# Altium PCB usbc-test-v1.PcbDoc (part 2 of 2)
Units mm, origin at the board's own origin, x right, y up, seen from the top; angles counter-clockwise.
Board outline 60 x 134.37 mm, 2 copper layers (Top Layer, Bottom Layer), stack 0.871 mm thick; 68 components, 63 nets, 626 pads, 262 vias.
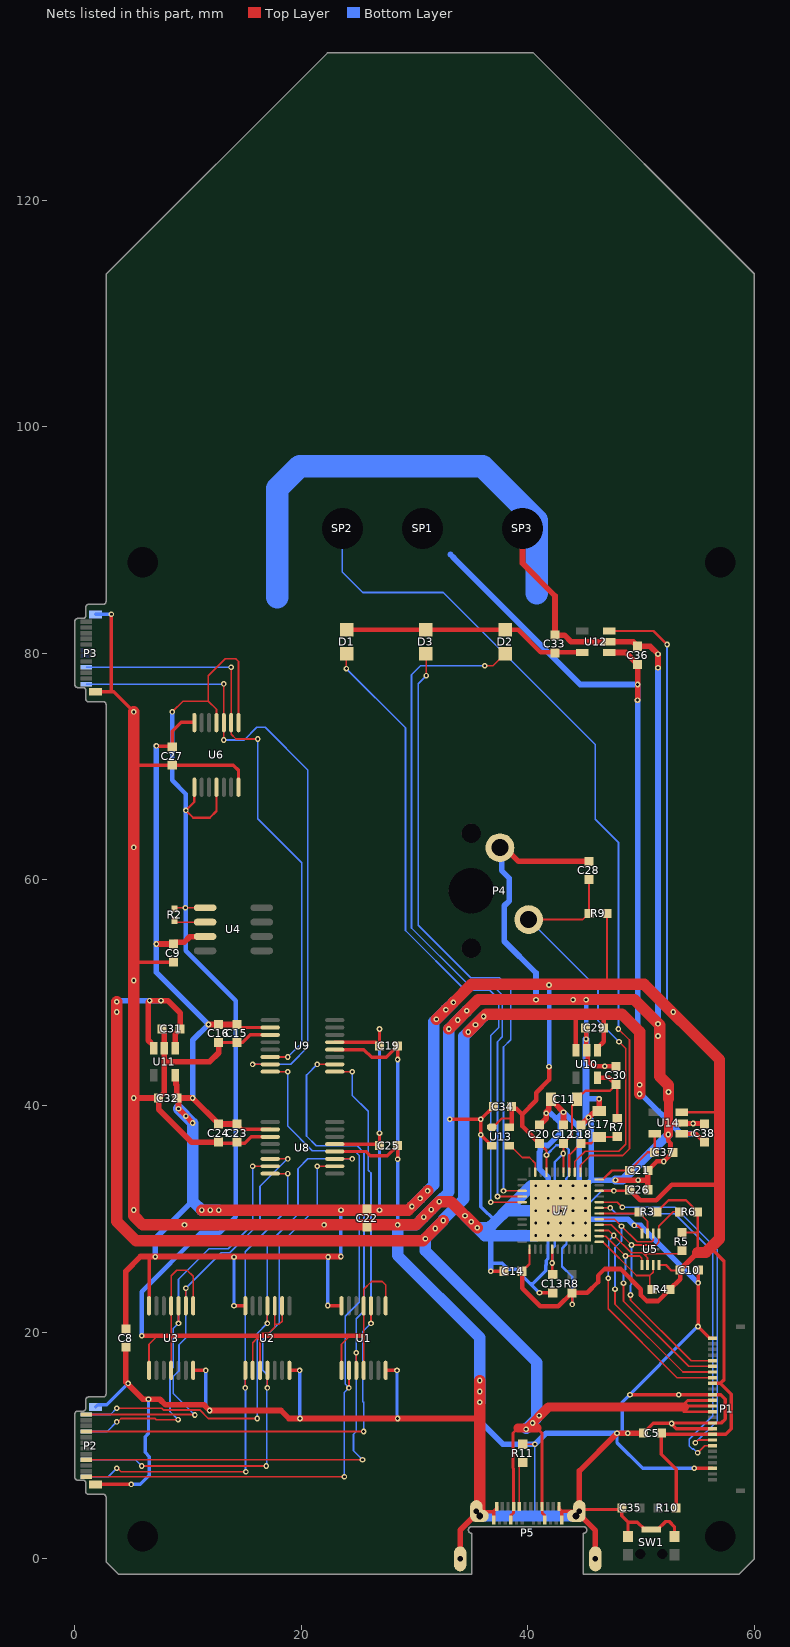
[diagram p2: the nets of this part, all layers, seen from the top]

## Via types
v1: diameter 0.5, hole 0.25, Top Layer to Bottom Layer, tented both sides, 237 vias
v2: diameter 0.5, hole 0.25, Top Layer to Bottom Layer, 25 vias

## Nets (pads, with @x,y where several pads share a name; then routed paths per layer and width w, separated by ;. In a path a pad name is that pad's centre, name@x,y a point inside that pad or via, vN(x,y) a via of type N, cw(c..) or ccw(c..) an arc to the next point about the centre after c; other vN are vias at no path point) (continued)
GND: C5.1 C8.2 C9.2 C10.2 C11.2 C12.2 C13.2 C14.2 C15.2 C16.1 C17.2 C18.2 C19.2 C20.2 C21.2 C22.1 C23.2 C24.1 C25.2 C26.2 C27.2 C28.2 C29.1 C30.1 C31.1 C32.1 C33.1 C34.2 C35.2 C36.1 C37.1 C38.1 P1.1 P1.11 P1.16 P1.17 P1.24 P2.0 P3.0 P4.1 P5.0 P5.A1 P5.A12 P5.B1 P5.B12 P5.MID pad.0@39.525,91 R11.1 SP3.1 SW1.2 SW1.3 SW1.4 U1.7 U2.7 U3.7 U5.4 U6.7 U7.PADDLE U8.3 U8.12 U9.3 U9.12 U10.2 U11.2 U12.2 U13.2 U14.2 | length 716
  Top Layer w0.15: R11.1@39.55,10.125 v1(40.625,10.125) v1@40.65,10.15
  Top Layer w0.2: v1(49.4,29.45) 49.695,29.45 50.075,29.07 U5.4@50.075,28.745
  Top Layer w0.3: P2.0@1.84,6.58 v1(4.98,6.58) v1@5,6.6 ; P3.0@1.84,76.58 3.201,76.58 ; v1(3.22,83.42) 3.22,76.599 3.201,76.58 ; 5.2,52.614 5.286,52.7 C9.2@8.7,52.7 ; 5.2,70.013 5.287,70.1 C27.2@8.6,70.1 14,70.1 14.45,69.65 U6.7@14.45,68.15 ; v1(5.2,74.8) 3.42,76.58 3.201,76.58 ; U3.7@10.45,16.65 v1(11.55,16.65) ; C24.1@12.7,36.8 12.8,36.7 15,36.7 15.575,37.275 U8.3@17.25,37.275 ; C16.1@12.7,45.6 C15.2@14.3,45.6 14.8,45.6 15.475,46.275 U9.3@17.25,46.275 ; U2.7@18.95,16.65 v1(19.85,16.65) ; U8.12@22.95,35.975 25.725,35.975 26.1,35.6 27.6,35.6 C25.2@28.5,36.5 v1(28.5,35.3) ; U9.12@22.95,44.975 25.525,44.975 26.2,44.3 27.5,44.3 C19.2@28.5,45.3 v1(28.5,44.1) ; U1.7@27.45,16.65 v1(28.45,16.65) ; v1(33.1,38.825) v1(35.85,38.825) ; P5.0@35.75,3.792 35.842,3.792 36.225,4.175 36.971,4.175 37,4.204 ; v1(36.725,25.4) C14.2@37.9,25.4 ; U13.2@36.825,36.475 36.725,36.475 36.55,36.65 36.55,36.75 v1(35.85,37.45) v1(35.85,38.825) ; C34.2@36.975,39.95 v1(35.85,38.825) ; P5.B12@37,3.43 37,4.204 ; P5.A1@37.25,4.63 37.25,4.38 37.176,4.38 37,4.204 ; v1(41.025,23.5) C13.2@42.2,23.5 ; P5.A12@42.75,4.63 42.75,4.38 42.824,4.38 43,4.204 ; P5.B1@43,3.43 43,4.204 ; SW1.2@48.85,1.975 48.85,3.25 ; v1(49.025,14.5) P1.11@56.3,14.5 57.025,14.5 57.425,14.1 57.425,12.35 57.075,12 P1.16@56.3,12 52.675,12 v1@52.65,11.975 ; C5.1@50.2,11.1 51.075,11.975 v1@52.65,11.975 ; SW1.4@52.95,1.975 52.95,2.85 52.5,3.3 52.175,3.3 51.475,2.6 SW1.3@50.9,2.6 50.325,2.6 49.675,3.25 48.85,3.25 ; v1(54.7,8) P1.24@56.3,8 ; C10.2@55.05,25.5 55.037,25.488 v1(55.037,24.373) 55.037,20.538 v1(55.025,20.525) 56.05,19.5 P1.1@56.3,19.5 ; P1.17@56.3,11.5 53.125,11.5 v1@52.65,11.975 ; 43,4.204 44.534,4.204 P5.0@44.55,4.22 44.69,4.36 48.16,4.36 C35.2@48.3,4.5 48.3,3.8 48.85,3.25
  Top Layer w0.4: C29.1@45.1,46.9 45.15,46.85 v1(45.15,45.9) 45.15,44.95 U10.2@45.2,44.9 45.3,44.8 45.3,43.975 45.775,43.5 C30.1@47.8,43.5 ; C21.2@50.6,34.3 51.4,35.1 v1(52,35.1) C37.1@52.8,35.9 52.6,36.1 52.6,36.725 52.4,36.925 v1(52.4,37.475) 52.4,38.025 52.425,38.05 52.75,38.375 53.475,38.375 U14.2@53.6,38.5 53.65,38.45 v1(54.6,38.45) 55.55,38.45 C38.1@55.6,38.4
  Top Layer w0.5: C8.2@4.5,18.7 4.5,15.6 6,14.1 v1(6.5,14.1) 7.5,14.1 8,13.6 11.4,13.6 v1(11.9,13.1) 18.2,13.1 18.9,12.4 v1(19.875,12.4) v1(28.5,12.4) 35.75,12.4 ; v1(5.2,40.7) 5.3,40.7 C32.1@7.4,40.7 ; C31.1@7.7,46.8 7.9,46.6 U11.2@7.9,45.1 7.9,43.915 ; C24.1@12.7,36.8 10.3,36.8 7.4,39.7 C32.1@7.4,40.7 ; C16.1@12.7,45.6 12.7,44.7 11.915,43.915 7.9,43.915 ; P5.MID@34.03,0 34.03,2.551 35.157,3.678 35.635,3.678 P5.0@35.75,3.792 ; P4.1@37.54,62.81 37.977,62.81 39.187,61.6 C28.2@45.4,61.6 ; SP3.1@39.525,91 39.525,87.925 42.4,85.05 C33.1@42.4,81.6 42.418,81.582 43.243,81.582 43.825,81 U12.2@47.2,81 49.3,81 C36.1@49.7,80.6 50.8,80.6 v1(51.5,79.9) v1(51.5,78.7) ; C20.2@41.025,38.3 41.625,38.9 41.625,39.475 41.85,39.7 41.85,40.4 C11.2@42.05,40.6 42.05,40.45 42.25,40.25 42.35,40.25 v1(43.15,39.45) C12.2@43.15,38.3 ; C18.2@44.7,38.3 45.75,39.35 46.1,39.35 C17.2@46.3,39.55 v1(46.3,40.625) ; P5.MID@45.97,0 45.97,2.511 44.55,3.931 P5.0@44.55,4.22 44.55,7.775 v1(47.875,11.1) v1(48.825,11.1) C5.1@50.2,11.1 ; v1(47.75,33.45) v1(49.739,33.45) 50.6,33.45 ; C26.2@50.6,32.6 50.6,33.45 ; C21.2@50.6,34.3 50.6,33.45 ; C32.1@7.4,40.7 7.9,41.2 7.9,43.915
  Top Layer w0.8: v1(52.4,37.475) 52.425,37.5 52.425,38.05 52.425,38.375 52.425,40.625
  Top Layer w1: v1(5.2,74.8) 5.2,70.013 5.2,52.614 v1(5.2,40.7) 5.2,30.3 6,29.5 v1(28.5,29.5) 30.125,29.5 v1(30.81,30.185) v1(31.466,30.841) v1(32.175,31.55) 33.2,31.55 v1(34.45,30.3) 34.475,30.3 v1(35,29.775) v1(35.538,29.238) ; v1(33.025,46.8) v1(33.813,47.588) 34.612,48.388 35.625,49.4 40.725,49.4 44,49.4 45.15,49.4 49.4,49.4 51.65,47.15 51.65,46.175 51.65,42.6 52.425,41.825 v1(52.425,41.225) 52.425,40.625 ; P5.0@35.75,3.792 35.75,12.4 v1(35.75,13.832) v1(35.75,14.776) v1(35.75,15.75)
  Bottom Layer w0.15: 40.578,3.792 40.625,3.839 v1(40.625,10.125)
  Bottom Layer w0.3: P2.0@1.84,13.42 2.04,13.62 2.82,13.62 v1(4.7,15.5) ; P3.0@1.84,83.42 v1(3.22,83.42) v1@3.225,83.425 ; v1(4.98,6.58) 5.78,6.58 6.576,7.376 6.576,9.024 6.2,9.4 6.2,10.8 6.5,11.1 v1(6.5,14.1) ; v1(11.55,16.65) 11.55,13.504 11.9,13.154 v1(11.9,13.1) ; v1(19.85,16.65) 19.862,16.638 19.862,12.412 v1(19.875,12.4) ; v1(28.45,16.65) 28.45,12.45 v1(28.5,12.4) ; v1(28.5,29.5) v1(28.5,35.3) v1(28.5,44.1) ; v1(35.85,37.45) 35.85,31.1 37.15,29.8 ; 36.725,26.121 37.754,26.121 38.3,25.575 38.95,25.575 40.228,24.297 ; v2(40.7,28.55) v2(41.8,28.55) ; v1(41.025,23.5) 40.228,24.297 ; v2(41.8,32.95) v2(41.8,31.85) v2(41.8,29.65) v2(41.8,28.55) ; v2(42.9,28.55) v2(42.9,29.65) v2(42.9,30.75) v2(42.9,31.85) v2(42.9,32.95) ; v2(44,28.55) v2(44,30.75) ; v2(44,31.85) 44.825,32.675 44.825,32.95 ; v2(45.1,28.55) v2(45.1,29.65) v2(45.1,30.75) ; v1(47.875,11.1) 47.875,10.275 50.15,8 v1(54.7,8) ; 48.35,11.1 48.35,13.85 v1(55.025,20.525) ; 40.228,24.297 40.422,24.297 41.575,25.45 41.575,25.925 41.63,25.98 41.63,26.34 41.78,26.49 41.78,28.53 v2(41.8,28.55)
  Bottom Layer w0.4: v1(44,49.375) v1(45.15,49.375) ; v1(45.15,45.9) v1(45.15,49.375) ; v1@45.175,49.4 v1(45.15,49.375)
  Bottom Layer w0.5: v1(35.75,13.832) 35.75,12.175 37.8,10.125 v1(40.625,10.125) 41.6,11.1 v1(47.875,11.1) 48.35,11.1 v1(48.825,11.1) ; v1(36.725,25.4) 36.725,26.121 36.725,28.4 36.875,28.55 ; P4.1@37.54,62.81 37.685,62.665 37.685,60.79 38.375,60.1 38.375,58.125 37.925,57.675 37.925,54.55 40.725,51.75 v1(40.725,49.375) ; v2(40.7,32.95) v2(41.8,32.95) 41.8,33.675 41.03,34.445 41.03,35.916 41.1,35.986 41.1,36.2 41.4,36.5 41.775,36.5 42.85,37.575 42.85,38.527 42.439,38.938 ; v1(41.632,39.348) 42.028,39.348 42.439,38.938 ; v2(44,29.65) v2(45.1,29.65) 45.45,30 48.85,30 v1(49.4,29.45) 49.96,29.45 v1(55.037,24.373) ; v2(44,32.95) 44.55,32.95 ; v2(45.1,31.85) v2(45.1,32.95) ; 45.15,40.63 45.155,40.625 v1(46.3,40.625) ; v1(45.352,38.982) 45.6,38.734 45.6,33.45 ; v1(47.75,33.45) 45.6,33.45 ; v1@51.475,46.15 v1(51.5,46.175) v1(51.5,47.249) v1(51.5,79.9) ; 42.439,38.938 42.638,38.938 v1(43.15,39.45) 44.55,38.05 44.55,32.95 ; 44.55,32.95 44.825,32.95 v2(45.1,32.95) ; v2(45.1,32.95) 45.6,33.45
  Bottom Layer w0.6: 44.55,38.05 45.15,38.65 45.15,40.63 v1(45.15,45.9)
  Bottom Layer w0.8: v1(47.75,33.45) 48.375,33.45 v1(52.4,37.475)
  Bottom Layer w1: v1(34.45,30.3) 36.2,28.55 36.875,28.55 v2(40.7,28.55) v2(40.7,30.75) ; v1(34.6,48.4) 34.6,48.375 v1(33.813,47.588) v1(33.025,46.8) 33.025,32.4 v1(32.175,31.55) v1(31.466,30.841) v1(30.81,30.185) 30.125,29.5 v1(28.5,29.5) 28.5,26.8 35.75,19.55 v1(35.75,14.776) v1(35.75,13.832) ; v1(35.538,29.238) 36.587,29.238 37.15,29.8 38.187,30.837 ; P5.0@35.75,3.792 40.578,3.792 44.504,3.792 44.55,3.839 P5.0@44.55,4.22 ; 38.187,30.837 40.3,32.95 v2(40.7,32.95) v2(40.7,30.75) ; 38.187,30.837 38.274,30.75 v2(40.7,30.75)
  Bottom Layer w2: 17.875,84.925 17.875,94.525 19.85,96.5 36,96.5 40.775,91.725 40.775,85.275
  other v1: 52.7,11.95 53.325,14.5 9.684,29.5 22.012,29.5 5.2,30.818 46.788,43.5 5.2,51.085 5.2,62.835
  other v2: 40.7,29.65 41.8,30.75 40.7,31.85
GND_A1: P2.A1 U1.2 U9.8 | length 67.3
  Top Layer w0.15: P2.A1@1,7.25 v1(23.8,7.25) ; U9.8@17.25,43.025 v1(18.8,43.025) ; v1(24.2,15.1) U1.2@24.2,16.65
  Bottom Layer w0.15: v1(18.8,43.025) 18.8,38.225 20.975,36.05 24.7,36.05 25.125,35.625 25.125,22.675 23.875,21.425 23.875,15.447 24.2,15.122 v1(24.2,15.1) 23.8,14.7 v1(23.8,7.25)
GND_A12: P2.A12 U3.9 U8.6 | length 40.8
  Top Layer w0.15: P2.A12@1,12.75 1.005,12.745 10.555,12.745 v1(10.6,12.7) v1@10.65,12.75 ; U3.9@9.8,22.35 v1(9.8,23.9) ; U8.6@17.25,35.325 v1(18.8,35.325)
  Bottom Layer w0.15: v1(10.6,12.7) 8.7,14.6 8.7,16.1 9.2,16.6 9.2,18.9 9.8,19.5 v1(9.8,23.9) 12.925,27.025 13.675,27.025 16.35,29.7 16.35,32.9 18.775,35.325 v1(18.8,35.325)
GND_B1: P2.B1 U2.11 U8.11 | length 47.5
  Top Layer w0.15: v1(3.7,13.3) 7.671,13.3 7.816,13.155 11.015,13.155 11.77,12.4 v1(16.1,12.4) ; v1(17,20.8) U2.11@17,22.35 ; U8.11@22.95,35.325 v1(24.5,35.325)
  Bottom Layer w0.15: P2.B1@1,12.75 3.15,12.75 v1(3.7,13.3) ; v1(16.1,12.4) 16.1,19.9 v1(17,20.8) 17,27.75 19.7,30.45 19.7,34.45 20.575,35.325 v1(24.5,35.325)
GND_B12: P2.B12 U2.1 U8.8 | length 45.5
  Top Layer w0.15: v1(3.7,8) 3.772,8 4.072,7.7 v1(15.1,7.7) ; v1(15.05,15.1) U2.1@15.05,16.65 ; U8.8@17.25,34.025 v1(18.8,34.025)
  Bottom Layer w0.15: P2.B12@1,7.25 2.95,7.25 v1(3.7,8) ; v1(15.1,7.7) 15.075,7.725 15.075,15.075 v1(15.05,15.1) 15.05,27.125 18.8,30.875 v1(18.8,34.025)
GND_EX: P3.A12 U6.10 U9.7 | length 58.1
  Top Layer w0.15: v1(13.15,72.325) U6.10@13.15,73.85 v1(13.15,77.275) ; v1(15.7,43.675) U9.7@17.25,43.675
  Bottom Layer w0.15: P3.A12@1,77.25 v1@13.15,77.25 ; v1(13.15,72.325) 14.95,72.325 16.075,73.45 16.8,73.45 20.575,69.675 20.575,45.2 19.05,43.675 v1(15.7,43.675)
ITEST: R2.1 U1.1 U1.4 U1.8 U1.11 U2.2 U2.3 U2.9 U2.10 U3.1 U3.4 U3.8 U3.11 U4.1 U6.1 U6.4 U6.8 U6.11 | length 152.1
  Top Layer w0.15: U3.1@6.55,16.65 6.55,18.95 7.3,19.7 ; U3.4@8.5,16.65 8.5,19.612 8.412,19.7 8.5,19.788 U3.11@8.5,22.35 8.5,25 9,25.5 9.9,25.5 10.45,24.95 U3.8@10.45,22.35 ; v1(8.6,74.8) 9.55,75.75 11.775,75.75 ; R2.1@8.8,57.4 8.905,57.505 U4.1@11.5,57.505 ; U6.11@12.5,73.85 12.5,75.025 11.775,75.75 ; U6.8@14.45,73.85 14.45,79.25 14.2,79.5 13.275,79.5 11.775,78 11.775,75.75 ; U2.2@15.7,16.65 15.7,19.1 16.1,19.5 ; U2.3@16.35,16.65 16.35,19.25 16.1,19.5 ; U2.10@17.65,22.35 17.65,20.727 ; U2.9@18.3,22.35 18.3,21 18.027,20.727 17.65,20.727 ; U1.1@23.55,16.65 23.55,18.95 24.3,19.7 ; U1.4@25.5,16.65 25.5,19.612 25.412,19.7 25.5,19.788 U1.11@25.5,22.35 25.5,23.8 26.2,24.5 27.136,24.5 27.45,24.186 U1.8@27.45,22.35 ; 16.1,19.5 16.3,19.7 16.5,19.9 17.1,19.9 17.65,20.45 17.65,20.727
  Top Layer w0.2: U6.1@10.55,68.15 10.55,66.85 v1(9.8,66.1) 10.45,65.45 11.9,65.45 12.5,66.05 U6.4@12.5,68.15
  Top Layer w0.4: v1(5.9,19.7) 7.3,19.7 8.412,19.7 16.3,19.7 24.3,19.7 25.412,19.7
  Bottom Layer w0.4: v1(5.9,19.7) 5.9,23.6 11.1,28.8 12.8,28.8 14.2,30.2 14.2,49.3 9.8,53.7 v1(9.8,66.1) 9.8,67.55 8.6,68.75 v1(8.6,74.8)
  other v1: 9.759,57.505
NetD1_2: D1.2 U7.41 | length 58.4
  Top Layer w0.15: v1(23.975,78.625) 23.975,79.925 D1.2@24,79.95 ; v1(36.725,31.5) U7.41@39.5,31.5
  Bottom Layer w0.15: v1(23.975,78.625) 29.2,73.4 29.2,55.5 34.475,50.225 36.625,50.225 37.425,49.425 37.425,46.925 36.725,46.225 v1(36.725,31.5)
NetD2_2: D2.2 U7.40 | length 62.1
  Top Layer w0.15: v1(36.2,78.875) 36.925,78.875 D2.2@38,79.95 ; v1(37.325,32) U7.40@39.5,32
  Bottom Layer w0.15: v1@36.225,78.9 v1(36.2,78.875) 30.525,78.875 29.73,78.08 29.73,55.72 34.625,50.825 36.725,50.825 37.75,49.8 37.75,46.1 37.325,45.675 v1(37.325,32)
NetD3_2: D3.2 U7.39 | length 54.6
  Top Layer w0.15: D3.2@31,79.95 31.025,79.925 v1(31.025,78) ; v1(37.85,32.5) U7.39@39.5,32.5
  Bottom Layer w0.15: v1(31.025,78) 30.314,77.289 30.314,55.961 34.95,51.325 37.5,51.325 38.5,50.325 38.5,45.85 37.85,45.2 v1(37.85,32.5)
NetP5_A5: P5.A5 R11.2 | length 4
  Top Layer w0.15: P5.A5@39.25,4.63 39.25,8.225 R11.2@39.55,8.525
NetR2_2: R2.2 U4.2 | length 2.8
  Top Layer w0.15: R2.2@8.8,56.4 8.965,56.235 U4.2@11.5,56.235
P1.2V: C11.1 C12.1 C13.1 C30.2 R7.1 U7.5 U7.30 U10.5 | length 28.4
  Top Layer w0.2: U7.5@42.15,27.35 v1(42.15,26.125) 42.15,25.15 C13.1@42.2,25.1 ; U7.30@43.15,34.15 43.15,36.45 C12.1@43.4,36.7 ; C12.1@43.15,36.7 43.9,37.45 43.9,40 44.35,40.45 C11.1@44.35,40.6 44.35,40.75 44.7,41.1 44.85,41.1 45.1,41.35 47.25,41.35 C30.2@47.8,41.9 47.9,41.8 R7.1@47.9,38.9
  Top Layer w0.4: U10.5@46.15,42.5 47.2,42.5 C30.2@47.8,41.9
  Bottom Layer w0.2: v1(42.15,26.125) 42.15,27.366 42.375,27.591 42.375,35.05 v1(43.125,35.8)
P2.5V: C21.1 C37.2 U7.24 U14.5 | length 7.5
  Top Layer w0.2: U7.24@46.3,33.5 46.625,33.5 47.425,34.3 C21.1@49,34.3 50.6,35.9 C37.2@51.2,35.9 U14.5@51.2,37.55
P3.3V: C5.2 C8.1 C9.1 C10.1 C14.1 C15.1 C16.2 C19.1 C20.1 C22.2 C23.1 C24.2 C25.1 C26.1 C27.1 C32.2 C34.1 P1.9 P1.18 R3.1 R4.1 R5.1 R6.1 R8.1 R9.1 R10.1 U1.14 U2.14 U3.14 U4.3 U5.8 U6.14 U7.1 U7.22 U7.33 U8.2 U8.13 U9.2 U9.13 U11.5 U12.3 U13.1 U13.4 U14.3 | length 412.6
  Top Layer w0.2: U13.1@36.825,38.125 36.925,38.125 37.693,38.893 38.575,38.893 ; C14.1@39.5,25.4 40.15,26.05 U7.1@40.15,27.35 ; C20.1@41.025,36.7 41.65,36.075 v1(41.65,35.659) U7.33@41.65,34.15 ; R8.1@43.9,23.5 43.925,23.475 v1(43.925,22.475) ; U7.22@46.3,32.5 v1(47.6,32.5) 48.9,32.5 C26.1@49,32.6 ; 46.992,50.75 47,50.758 R9.1@47,57 ; U12.3@47.2,81.95 51.1,81.95 v1(52.3,80.75) ; R3.1@51.4,30.65 52.425,31.675 53.975,31.675 R6.1@55,30.65 55,28.85 ; U5.8@51.575,25.955 52.195,25.955 52.675,25.475 53.425,25.475 C10.1@53.45,25.5 ; R5.1@53.6,28.825 54.975,28.825 55,28.85 ; U14.3@53.6,39.45 56.864,39.45 56.925,39.389 ; 55,27.05 55,28.85
  Top Layer w0.3: U3.14@6.55,22.35 6.55,26.601 6.649,26.7 ; v1(7.2,71.8) 7.238,71.762 8.538,71.762 C27.1@8.6,71.7 8.6,73.1 9.4,73.9 10.527,73.9 10.55,73.877 U6.14@10.55,73.85 ; v1@14,22.4 v1(14.05,22.35) U2.14@15.05,22.35 ; C23.1@14.3,38.4 14.775,37.925 U8.2@17.25,37.925 ; C15.1@14.3,47.2 14.575,46.925 U9.2@17.25,46.925 ; 15.05,26.695 15.055,26.7 ; v1@22.3,22.4 v1(22.325,22.375) 22.35,22.35 U1.14@23.55,22.35 ; U8.13@22.95,36.625 22.96,36.615 26.785,36.615 C25.1@26.9,36.5 v1(26.9,37.6) ; U9.13@22.95,45.625 26.575,45.625 C19.1@26.9,45.3 v1(26.9,46.8) ; v1(23.493,26.7) v1@23.55,26.643 ; C5.2@51.8,11.1 C5.2@51.9,11 ; R10.1@53.1,4.5 53.1,7.925 51.8,9.225 51.8,10.9 C5.2@51.9,11 ; 56.275,27.325 57.325,26.275 57.325,15.825 57,15.5 ; P1.9@56.3,15.5 57,15.5 ; C5.2@51.9,11 P1.18@56.3,11 57.5,11 57.975,11.475 57.975,14.525 57,15.5
  Top Layer w0.4: U13.4@38.375,38.125 38.45,38.125 38.575,38.25 38.575,38.893 C34.1@38.575,39.95 38.775,39.75 39,39.75 39.5,39.25 ; C14.1@39.5,25.4 39.5,23.9 41.1,22.3 42.7,22.3 R8.1@43.9,23.5 45.25,23.5 46.2,24.45 46.2,25.025 46.775,25.6 48.2,25.6 49.975,23.825 49.975,23.3 50.5,22.775 51.525,22.775 R4.1@52.55,23.8 53.45,24.7 C10.1@53.45,25.5 ; C20.1@41.025,36.7 39.5,38.225 39.5,39.25 ; v1(41.875,43.475) 41.875,42.3 40.75,41.175 40.75,40.5 39.5,39.25 ; C26.1@49,32.6 49.925,31.675 51.35,31.675 52.718,33.043 56.925,33.043
  Top Layer w0.5: C8.1@4.5,20.3 4.5,25.4 5.8,26.7 6.649,26.7 15.055,26.7 v1(23.493,26.7) ; v1(7.2,54.3) C9.1@8.7,54.3 8.85,54.45 9.65,54.45 10.146,54.946 11.481,54.946 U4.3@11.5,54.965 ; U11.5@8.85,42.7 8.925,42.625 8.925,41.925 9,41.85 C32.2@9,40.7 ; v1(10.4,38.5) v1(9.8,39.1) v1(9.15,39.75) 9.15,40.55 C32.2@9,40.7 ; v1(11.8,47.2) C16.2@12.7,47.2 C15.1@14.3,47.2 ; C23.1@14.3,38.4 C24.2@12.7,38.4 v1(10.4,40.7) C32.2@9,40.7 ; C10.1@53.45,25.5 55,27.05
  Top Layer w1: v1(11.2,30.8) v1(11.95,30.8) v1(12.7,30.8) v1(23.5,30.8) v1(26.9,30.8) 29.45,30.8 v1(29.764,31.114) v1(30.491,31.841) v1(31.15,32.5) ; v1(31.926,47.651) v1(32.765,48.49) v1(33.425,49.15) 35.025,50.75 46.992,50.75 50.275,50.75 56.925,44.1 56.925,39.389 56.925,33.043 56.925,28.275 55.7,27.05 55,27.05
  Bottom Layer w0.2: v1(41.65,35.659) 42.516,36.525 43.25,36.525 43.625,36.15 43.625,33.825 43.4,33.6 43.4,31.625 43.75,31.275 ; v1(43.925,22.475) 43.925,24.925 43.025,25.825 43.025,27.4 43.425,27.8 43.425,30.95 43.75,31.275 ; v1(47.6,32.5) 46.525,32.5 45.3,31.275 43.75,31.275 ; v1(52.3,80.75) 52.3,48.85 v1(52.85,48.3)
  Bottom Layer w0.3: v1(14.05,22.35) v1(14.05,26.65) v1@14.1,26.7 ; v1(22.325,22.375) 22.325,26.625 v1(22.363,26.663) v1@22.4,26.7 ; v1(23.493,26.7) 23.493,30.793 v1(23.5,30.8) ; v1(26.9,30.8) v1(26.9,37.6) v1(26.9,46.8)
  Bottom Layer w0.4: v1(41.875,43.475) v1(41.875,50.675)
  Bottom Layer w0.5: v1(7.1,26.675) 7.1,28.3 10.4,31.6 ; v1(7.2,71.8) v1(7.2,54.3) 7.2,51.8 v1(11.8,47.2) 10.4,45.8 v1(10.4,40.7)
  Bottom Layer w1: v1(9.15,39.75) v1(10.4,38.5) 10.4,31.6 v1(11.2,30.8) v1(11.95,30.8) v1(12.7,30.8) ; v1(29.764,31.114) v1(30.491,31.841) v1(31.15,32.5) 31.7,33.05 31.7,47.425 v1(31.926,47.651) v1(32.765,48.49) v1(33.425,49.15)
P3.8V: C33.2 D1.1 D2.1 D3.1 U12.5 | length 21.6
  Top Layer w0.4: D1.1@24,82.05 D3.1@31,82.05 D2.1@38,82.05 39.15,82.05 41.15,80.05 U12.5@44.8,80.05
RUN: C28.1 P4.2 R9.2 U7.28 | length 38
  Top Layer w0.15: P4.2@40.08,56.46 44.86,56.46 R9.2@45.4,57 C28.1@45.4,60 ; U7.28@44.15,34.15 44.15,35.1 45.063,36.013 48.038,36.013 48.65,36.625 48.65,45.075 v1(48.05,45.675)
  Bottom Layer w0.15: P4.2@40.08,56.46 46.2,50.34 46.2,47.525 v1(48.05,45.675)
SCREEN_TX: pad.0@23.625,91 SP2.1 U7.27 | length 75
  Top Layer w0.15: U7.27@44.65,34.15 44.65,34.775 45.5,35.625 48.375,35.625 48.975,36.225 48.975,45.825 v1(48,46.8)
  Bottom Layer w0.15: pad.0@23.625,91 23.625,87.15 25.425,85.35 32.525,85.35 45.95,71.925 45.95,65.325 48,63.275 v1(48,46.8)
SYSCLK: U7.35 U13.3 | length 3.7
  Top Layer w0.15: U13.3@38.375,36.475 38.475,36.475 39.5,35.45 40.15,35.45 40.65,34.95 U7.35@40.65,34.15
UART_RX: P1.19 U7.20 | length 31.6
  Top Layer w0.15: U7.20@46.3,31.5 47.9,31.5 v1(48.35,31.05) ; v1(54.8,10.25) 55.05,10.5 P1.19@56.3,10.5
  Bottom Layer w0.15: v1(48.35,31.05) 53,31.05 56.725,27.325 56.725,12.175 v1(54.8,10.25)
UART_TX: P1.20 U7.19 | length 32.2
  Top Layer w0.15: U7.19@46.3,31 v1(47.275,31) ; v1(55,9.375) 55.625,10 P1.20@56.3,10
  Bottom Layer w0.15: v1(47.275,31) 47.8,30.475 52.975,30.475 56.325,27.125 56.325,12.65 54.25,10.575 54.25,9.963 54.51,9.702 54.656,9.702 54.983,9.375 v1(55,9.375)
UP5K_CIPO: P1.7 U5.2 U7.17 | length 24.5
  Top Layer w0.15: U7.17@46.3,30 47.65,30 v1@48.267,29.383 ; v1(47.7,23.824) 47.7,22.5 53.7,16.5 P1.7@56.3,16.5 ; v1(48.267,29.38) v1@48.267,29.383 ; U5.2@51.075,28.745 51.075,28.125 50.95,28 49.65,28 v1@48.267,29.383
  Bottom Layer w0.15: v1(47.7,23.824) 47.7,27.5 48.267,28.067 v1(48.267,29.38)
UP5K_COPI: P1.6 U5.5 U7.14 | length 19.5
  Top Layer w0.15: U7.14@46.3,28.5 46.875,28.5 v1(48.625,26.75) 49.875,26.75 50.075,26.55 U5.5@50.075,25.955 ; v1(48.45,24.35) 48.45,22.75 54.2,17 P1.6@56.3,17
  Bottom Layer w0.15: v1(48.45,24.35) 48.45,25.375 48.625,25.55 v1(48.625,26.75)
UP5K_CSN: P1.5 R6.2 U5.1 U7.16 | length 24.2
  Top Layer w0.15: U7.16@46.3,29.5 47.375,29.5 v1(49.15,27.725) 51.35,27.725 51.575,27.95 51.575,28.025 U5.1@51.575,28.745 51.575,29.375 52.85,30.65 R6.2@53.4,30.65 ; v1(49.075,23.307) 49.075,22.85 54.425,17.5 P1.5@56.3,17.5
  Bottom Layer w0.15: v1(49.075,23.307) 49.075,24.175 49.15,24.25 v1(49.15,27.725)
UP5K_DIO2: R3.2 U5.3 U7.18 | length 5.6
  Top Layer w0.15: U7.18@46.3,30.5 49.9,30.5 50.575,29.825 U5.3@50.575,28.745
UP5K_DIO3: R4.2 U5.7 U7.13 | length 8.1
  Top Layer w0.15: U7.13@46.3,28 46.625,28 49.6,25.025 50.775,25.025 ; R4.2@50.95,23.8 50.775,23.975 50.775,25.025 ; U5.7@51.075,25.955 51.075,25.325 50.775,25.025
UP5K_PLL: C17.1 C18.1 R7.2 U7.29 | length 6.4
  Top Layer w0.2: U7.29@43.65,34.15 43.65,35.65 C18.1@44.7,36.7 45.6,36.7 46.15,37.25 C17.1@46.3,37.25 47.85,37.25 R7.2@47.9,37.3
UP5K_SCK: P1.8 R5.2 U5.6 U7.15 | length 27.7
  Top Layer w0.15: U7.15@46.3,29 47.15,29 v1(47.594,28.556) 49.125,27.025 50.15,27.025 50.363,26.812 ; v1(47.109,24.777) 47.1,24.768 47.1,22.075 53.175,16 P1.8@56.3,16 ; U5.6@50.575,25.955 50.575,26.6 50.363,26.812 ; R5.2@53.6,27.225 53.325,26.95 50.5,26.95 50.363,26.812
  Bottom Layer w0.15: v1(47.109,24.777) 47.1,24.786 47.1,25.368 47.145,25.413 47.145,28.107 v1(47.594,28.556)
VBUS: C29.2 C31.2 C36.2 C38.2 P1.12 P1.13 P1.14 P5.A4 P5.A9 P5.B4 P5.B9 pad.0@30.7,91 SP1.1 U10.1 U10.3 U11.1 U11.3 U12.1 U14.1 | length 250.7
  Top Layer w0.25: P5.B9@38.5,3.43 38.525,3.455 38.525,3.851 38.725,4.051 38.725,4.605 P5.A4@38.75,4.63 38.75,7.956 38.679,8.028 38.679,11.104 39.125,11.55 ; 40.8,11.55 41.25,11.1 P5.A9@41.25,4.63 41.275,4.605 41.275,4.051 41.475,3.851 41.475,3.455 P5.B4@41.5,3.43 ; P1.14@56.3,13 53.8,13 53.775,13.025 53.85,13.1 ; P1.13@56.3,13.5 54.25,13.5 53.85,13.1 ; P1.12@56.3,14 54.125,14 53.85,13.725 53.85,13.413 53.85,13.1
  Top Layer w0.4: U10.3@44.25,44.9 44.25,48.05 44.3,48.1 ; U10.1@46.15,44.9 46.15,45.125 46.7,45.675 C29.2@46.7,46.9 46.7,48.077 46.677,48.1 ; U14.1@53.6,37.55 v1(54.624,37.55) 54.85,37.55 C38.2@55.6,36.8
  Top Layer w0.5: U11.3@6.95,45.1 6.95,45.325 6.475,45.8 6.475,49.175 v1(6.6,49.3) v1(7.6,49.3) 8.2,49.3 9.3,48.2 C31.2@9.3,46.8 8.85,46.35 U11.1@8.85,45.1 ; U12.1@47.2,80.05 48.65,80.05 C36.2@49.7,79 v1(49.7,77.225) 49.7,75.85 v1@49.675,75.825
  Top Layer w0.8: 39.125,11.55 v1@39.963,11.55 ; 40.8,11.55 v1@39.963,11.55 ; 53.85,13.413 41.825,13.413 v1@39.963,11.55
  Top Layer w1: v1(3.7,49.2) v1(3.7,48.3) 3.7,29.8 5.4,28.1 30.75,28.1 v1(31.825,29.175) v1(32.533,29.883) ; v1(34.735,46.535) v1(35.377,47.177) v1(36.1,47.9) 36.3,48.1 44.3,48.1 46.677,48.1 48.325,48.1 49.875,46.55 v1(49.875,41.879) v1(49.875,41.05)
  Bottom Layer w0.5: v1(3.7,48.3) v1(3.7,49.2) 3.8,49.3 v1(6.6,49.3) v1(7.6,49.3) ; 33.175,88.7 33.5,88.375 33.5,88.35 44.625,77.225 v1(49.7,77.225) 49.7,44.025 49.825,43.9 49.825,41.929 v1(49.875,41.879) 49.875,41.2 53.525,37.55 v1(54.624,37.55)
  Bottom Layer w1: v1(30.95,28.275) 30.95,27.2 40.8,17.35 40.8,12.45 v1@39.875,11.525 ; v1@30.95,28.3 v1(31.825,29.175) v1(32.533,29.883) 32.533,29.967 34.35,31.784 34.35,46.15 v1(34.735,46.535) v1(35.377,47.177) v1(36.1,47.9)
  other v1: 39.85,11.45 40.425,12 41,12.65 49.688,75.837
VBUS_A4: P2.A4 U1.3 U9.10 | length 67.7
  Top Layer w0.15: P2.A4@1,8.75 v1(25.4,8.75) ; v1(21.4,43.675) U9.10@22.95,43.675 ; U1.3@24.85,16.65 v1(24.85,18.2)
  Bottom Layer w0.15: v1(21.4,43.675) 20.45,42.725 20.45,37.35 21.325,36.475 24.925,36.475 25.525,35.875 25.525,21.875 24.85,21.2 v1(24.85,18.2) 24.85,11.25 24.6,11 24.6,9.55 v1(25.4,8.75)
VBUS_A9: P2.A9 U1.10 U9.9 | length 60.4
  Top Layer w0.15: P2.A9@1,11.25 v1(25.5,11.25) ; U9.9@22.95,43.025 v1(24.5,43.025) ; v1(26.15,20.8) U1.10@26.15,22.35
  Bottom Layer w0.15: v1(24.5,43.025) 24.5,40.925 25.9,39.525 25.9,34.325 26.15,34.075 v1(26.15,20.8) 25.43,20.08 25.43,13.888 25.5,13.818 v1(25.5,11.25)
VBUS_B4: P2.B4 U3.10 U8.7 | length 38.4
  Top Layer w0.15: v1(3.7,12.1) 3.772,12.1 4.072,12.4 7.1,12.4 7.2,12.3 v1(9.121,12.3) ; v1(9.15,20.8) U3.10@9.15,22.35 ; v1(15.7,34.675) U8.7@17.25,34.675
  Bottom Layer w0.15: P2.B4@1,11.25 2.85,11.25 v1(3.7,12.1) ; v1(9.121,12.3) 8.4,13.021 8.4,16.6 8.7,16.9 8.7,20.35 v1(9.15,20.8) 9.15,24.7 11.85,27.4 13.55,27.4 15.7,29.55 v1(15.7,34.675)
VBUS_B9: P2.B9 U2.4 U8.10 | length 47.9
  Top Layer w0.15: v1(5.9,8.2) v1(16.9,8.2) ; v1(17,15.1) U2.4@17,16.65 ; v1(21.4,34.675) U8.10@22.95,34.675
  Bottom Layer w0.15: P2.B9@1,8.75 5.35,8.75 v1(5.9,8.2) ; v1(16.9,8.2) 16.95,8.25 16.95,15.05 v1(17,15.1) 17,16.25 16.6,16.65 16.6,19.375 18.05,20.825 18.05,27.725 21.4,31.075 v1(21.4,34.675)
VBUS_EX: P3.A9 U6.9 U9.6 | length 53
  Top Layer w0.15: v1(13.8,78.75) U6.9@13.8,73.85 13.8,72.825 14.225,72.4 v1(16.15,72.4) v1@16.175,72.375 ; U9.6@17.25,44.325 v1(18.8,44.325)
  Bottom Layer w0.15: P3.A9@1,78.75 v1(13.8,78.75) ; v1(16.15,72.4) 16.15,65.35 20.025,61.475 20.025,45.55 v1(18.8,44.325)
pads on no net: P1.0 P1.2 P1.3 P1.10 P1.15 P1.21 P1.22 P1.23 P1.25 P1.26 P2.A2 P2.A3 P2.A8 P2.A10 P2.A11 P2.B2 P2.B3 P2.B8 P2.B10 P2.B11 P3.A1 P3.A2 P3.A3 P3.A4 P3.A5 P3.A8 P3.A10 P3.A11 P3.B1 P3.B2 P3.B3 P3.B4 P3.B5 P3.B8 P3.B9 P3.B10 P3.B11 P3.B12 P4.0 P5.A2 P5.A3 P5.A6 P5.A7 P5.A8 P5.A10 P5.A11 P5.B2 P5.B3 P5.B5 P5.B6 P5.B7 P5.B8 P5.B10 P5.B11 SW1.0 SW1.1 U4.4 U4.5 U4.6 U4.7 U4.8 U5.9 U7.21 U7.23 U7.25 U7.26 U10.4 U11.4 U12.4 U14.4

## Polygon pours and split planes (outlines as drawn)
GND on Bottom Layer (solid, remove dead copper, pour order 0): 2.745,5.499 11.751,5.499 17.425,-0.175 49.55,-0.175 59.75,10.025 59.75,79.7 52.75,86.7 9.85,86.7 7.35,84.2 3.751,84.2 2.971,83.42 2.971,5.724

## Keep-outs
Keep-Out Layer:
  lines w0.05: 0,7.2 ccw(c0.25,7.2) 0.25,6.95 0.71,6.95 cw(c0.71,6.7) 0.96,6.7 0.96,5.95 ccw(c1.21,5.95) 1.21,5.7 ; 0,12.8 cw(c0.25,12.8) 0.25,13.05 0.71,13.05 ccw(c0.71,13.3) 0.96,13.3 0.96,14.05 cw(c1.21,14.05) 1.21,14.3 ; 0,77.2 ccw(c0.25,77.2) 0.25,76.95 0.71,76.95 cw(c0.71,76.7) 0.96,76.7 0.96,75.95 ccw(c1.21,75.95) 1.21,75.7 ; 0,82.8 cw(c0.25,82.8) 0.25,83.05 0.71,83.05 ccw(c0.71,83.3) 0.96,83.3 0.96,84.05 cw(c1.21,84.05) 1.21,84.3 ; 1.22,5.7 2.5,5.7 ; 1.22,14.3 2.5,14.3 ccw(c2.5,14.55) 2.75,14.55 ; 1.22,75.7 2.5,75.7 ; 1.22,84.3 2.5,84.3 ccw(c2.5,84.55) 2.75,84.55 ; 2.75,5.45 ccw(c2.5,5.45) 2.5,5.7 ; 2.75,75.45 ccw(c2.5,75.45) 2.5,75.7 ; 2.5,5.7 2.5,5.7 ; 2.5,75.7 2.5,75.7
  lines w0.1: 0,7.2 0,12.8 ; 0,77.2 0,82.8 ; 2.75,5.45 2.75,-0.25 3.87,-1.37 35.06,-1.37 35.06,2.255 ; 2.75,14.55 2.75,75.45 ; 2.75,84.55 2.75,113.45 22.3,133 40.5,133 60,113.5 60,106 60,0 58.63,-1.37 44.9,-1.37 44.9,2.255 ; 35.052,2.255 cw(c35.052,2.555) 35.052,2.855 ; 35.06,2.855 39.98,2.855 44.9,2.855 ; 44.908,2.255 ccw(c44.908,2.555) 44.908,2.855

## Other copper
Top Layer:
  rectangle: 58.2,5.2 59.6,6.4
  rectangle: 58.2,20.1 59.6,21.2
Multi-Layer:
  region net SCREEN_TX: 22.27,88.561 22.375,88.544 22.481,88.527 22.587,88.51 22.693,88.493 22.799,88.476 22.905,88.46 23.012,88.444 23.119,88.429 23.226,88.413 23.334,88.398 23.441,88.383 23.549,88.369 23.658,88.354 23.766,88.34 23.875,88.327 23.983,88.313 24.093,88.3 24.195,88.287 24.299,88.275 24.402,88.264 24.505,88.252 24.609,88.241 24.713,88.229 24.817,88.218 24.922,88.208 25.026,88.197 25.131,88.187 25.236,88.177 25.341,88.167 25.446,88.157 25.552,88.148 25.657,88.139 25.763,88.129 25.869,88.121 25.975,88.112 26.082,88.104 26.188,88.095 26.295,88.087 26.402,88.08 26.509,88.072 26.617,88.065 26.724,88.057 26.832,88.05 26.866,88.048 26.866,92.468 ccw(c25.861,92.468) 26.864,92.531 ccw(c25.872,92.468) 26.847,92.662 ccw(c25.873,92.468) 26.755,92.924 ccw(c25.862,92.462) 26.665,93.067 ccw(c25.857,92.459) 26.328,93.354 ccw(c25.865,92.474) 26.172,93.42 ccw(c25.867,92.478) 25.918,93.467 ccw(c25.866,92.464) 25.866,93.468 21.515,93.468 ccw(c21.515,92.464) 21.452,93.466 ccw(c21.515,92.476) 21.313,93.447 ccw(c21.515,92.476) 21.066,93.361 ccw(c21.52,92.465) 20.929,93.277 ccw(c21.524,92.46) 20.62,92.911 ccw(c21.507,92.468) 20.515,92.473 20.515,92.468 20.516,89.422 20.516,88.905 20.622,88.881 20.723,88.859 20.825,88.837 20.926,88.815 21.028,88.794 21.13,88.773 21.232,88.752 21.335,88.732 21.438,88.712 21.541,88.692 21.644,88.673 21.748,88.653 21.852,88.634 21.956,88.616 22.061,88.597 22.165,88.579
  region net VBUS: 28.367,87.973 28.625,87.963 28.884,87.955 29.147,87.947 29.41,87.94 29.675,87.933 29.94,87.928 30.209,87.924 30.479,87.92 30.75,87.918 31.021,87.916 31.297,87.916 31.337,87.916 31.705,87.917 32.069,87.919 32.432,87.923 32.793,87.929 33.153,87.937 33.508,87.946 33.861,87.957 34.213,87.97 34.493,87.981 34.515,88.484 34.577,89.894 32.533,89.193 34.285,93.468 29.096,93.468 ccw(c29.096,92.463) 29.033,93.466 ccw(c29.095,92.477) 28.809,93.426 ccw(c29.096,92.474) 28.637,93.356 ccw(c29.104,92.459) 28.299,93.071 ccw(c29.099,92.462) 28.207,92.926 ccw(c29.087,92.468) 28.114,92.659 ccw(c29.089,92.468) 28.097,92.531 ccw(c29.1,92.468) 28.095,92.468 28.095,87.983 28.107,87.984
  region net GND: 36.181,88.074 36.3,88.083 36.413,88.091 36.526,88.1 36.639,88.108 36.752,88.117 36.864,88.127 36.976,88.136 37.088,88.146 37.2,88.156 37.311,88.166 37.423,88.177 37.534,88.187 37.644,88.198 37.755,88.21 37.865,88.221 37.976,88.233 38.086,88.245 38.195,88.257 38.305,88.269 38.414,88.282 38.523,88.295 38.632,88.308 38.74,88.322 38.849,88.335 38.957,88.349 39.065,88.364 39.172,88.378 39.28,88.393 39.387,88.408 39.494,88.423 39.6,88.439 39.707,88.454 39.813,88.47 39.919,88.487 40.025,88.503 40.13,88.52 40.235,88.537 40.34,88.555 40.445,88.572 40.549,88.59 40.654,88.608 40.757,88.627 40.861,88.646 40.965,88.665 41.068,88.684 41.171,88.704 41.273,88.724 41.376,88.744 41.478,88.764 41.579,88.785 41.681,88.806 41.782,88.828 41.883,88.849 41.984,88.871 42.085,88.893 42.135,88.905 42.135,92.468 ccw(c41.13,92.468) 42.133,92.531 ccw(c41.141,92.468) 42.115,92.664 ccw(c41.142,92.468) 42.024,92.924 ccw(c41.13,92.462) 41.933,93.069 ccw(c41.126,92.46) 41.604,93.35 ccw(c41.134,92.473) 41.46,93.413 ccw(c41.136,92.478) 41.178,93.467 ccw(c41.135,92.464) 41.135,93.468 36.317,93.468 35.959,91.964 37.509,92.351

## Silkscreen, mask and mechanical layers (free items; w line width, h text height)
Top Overlay:
  text "Reverse Test" at 4.8,79.5 h2
  text "PASS" at 21.9,76.5 h2
  text "RUN" at 29.2,76.5 h2
  text "FAIL" at 36.5,76.5 h2
  text "START" at 32.3,49.3 h2
  text "Top Test" at 4.8,9.3 h2
  text "bunnie" at 17.3,4.7 h1.8
  text "USB-C Tester" at 17.3,2.7 h1.8
  text "v1" at 17.3,0.7 h1.8
  text "12/21" at 20.8,0.7 h1.8
Bottom Overlay:
  region: 39.5,120.75 22.25,120.75 22.25,114.75 39.5,114.75
  text "CERN OHL 1.2" at 35.758,104.481 h1.8
  text "https://github.com/betrusted-io" at 40.05,102.2 h1.5
Mechanical 1:
  drawing of 599 lines, arcs and shapes, not listed
Fab Notes:
  drawing of 191 lines, arcs and shapes, not listed
  text "Layer" at 76.602,3.479 h1.52
  text "Name" at 87.013,3.479 h1.52
  text "Material" at 110.629,3.479 h1.52
  text "Thickness" at 132.467,3.479 h1.52
  text "Constant" at 148.973,3.479 h1.52
  text "Board Layer Stack" at 163.447,3.479 h1.52
  text "Top Overlay" at 87.013,0.431 h1.52
  text "Top Solder" at 87.013,-2.617 h1.52
  text "Solder Resist" at 110.629,-2.617 h1.52
  text "0.010mm" at 132.467,-2.617 h1.52
  text "3.5" at 148.973,-2.617 h1.52
  text "1" at 76.602,-5.665 h1.52
  text "Top Layer" at 87.013,-5.665 h1.52
  text "0.036mm" at 132.467,-5.665 h1.52
  text "Dielectric 1" at 87.013,-8.713 h1.52
  text "FR-4" at 110.629,-8.713 h1.52
  text "0.800mm" at 132.467,-8.713 h1.52
  text "4.8" at 148.973,-8.713 h1.52
  text "2" at 76.602,-11.761 h1.52
  text "Bottom Layer" at 87.013,-11.761 h1.52
  text "0.036mm" at 132.467,-11.761 h1.52
  text "Bottom Solder" at 87.013,-14.809 h1.52
  text "Solder Resist" at 110.629,-14.809 h1.52
  text "0.010mm" at 132.467,-14.809 h1.52
  text "3.5" at 148.973,-14.809 h1.52
  text "Bottom Overlay" at 87.013,-17.857 h1.52
  text "Solder mask green / Silkscreen white / HASL finish" at 82.7,-32.283 h1.5